# Altium PCB WreckerCar_PCB.PcbDoc
Units mil, origin at the board's own origin, x right, y up, seen from the top; angles counter-clockwise.
Board outline 2790.87 x 2195.87 mil, 2 copper layers (Top Layer, Bottom Layer); 47 components, 80 nets, 305 pads, 101 vias.
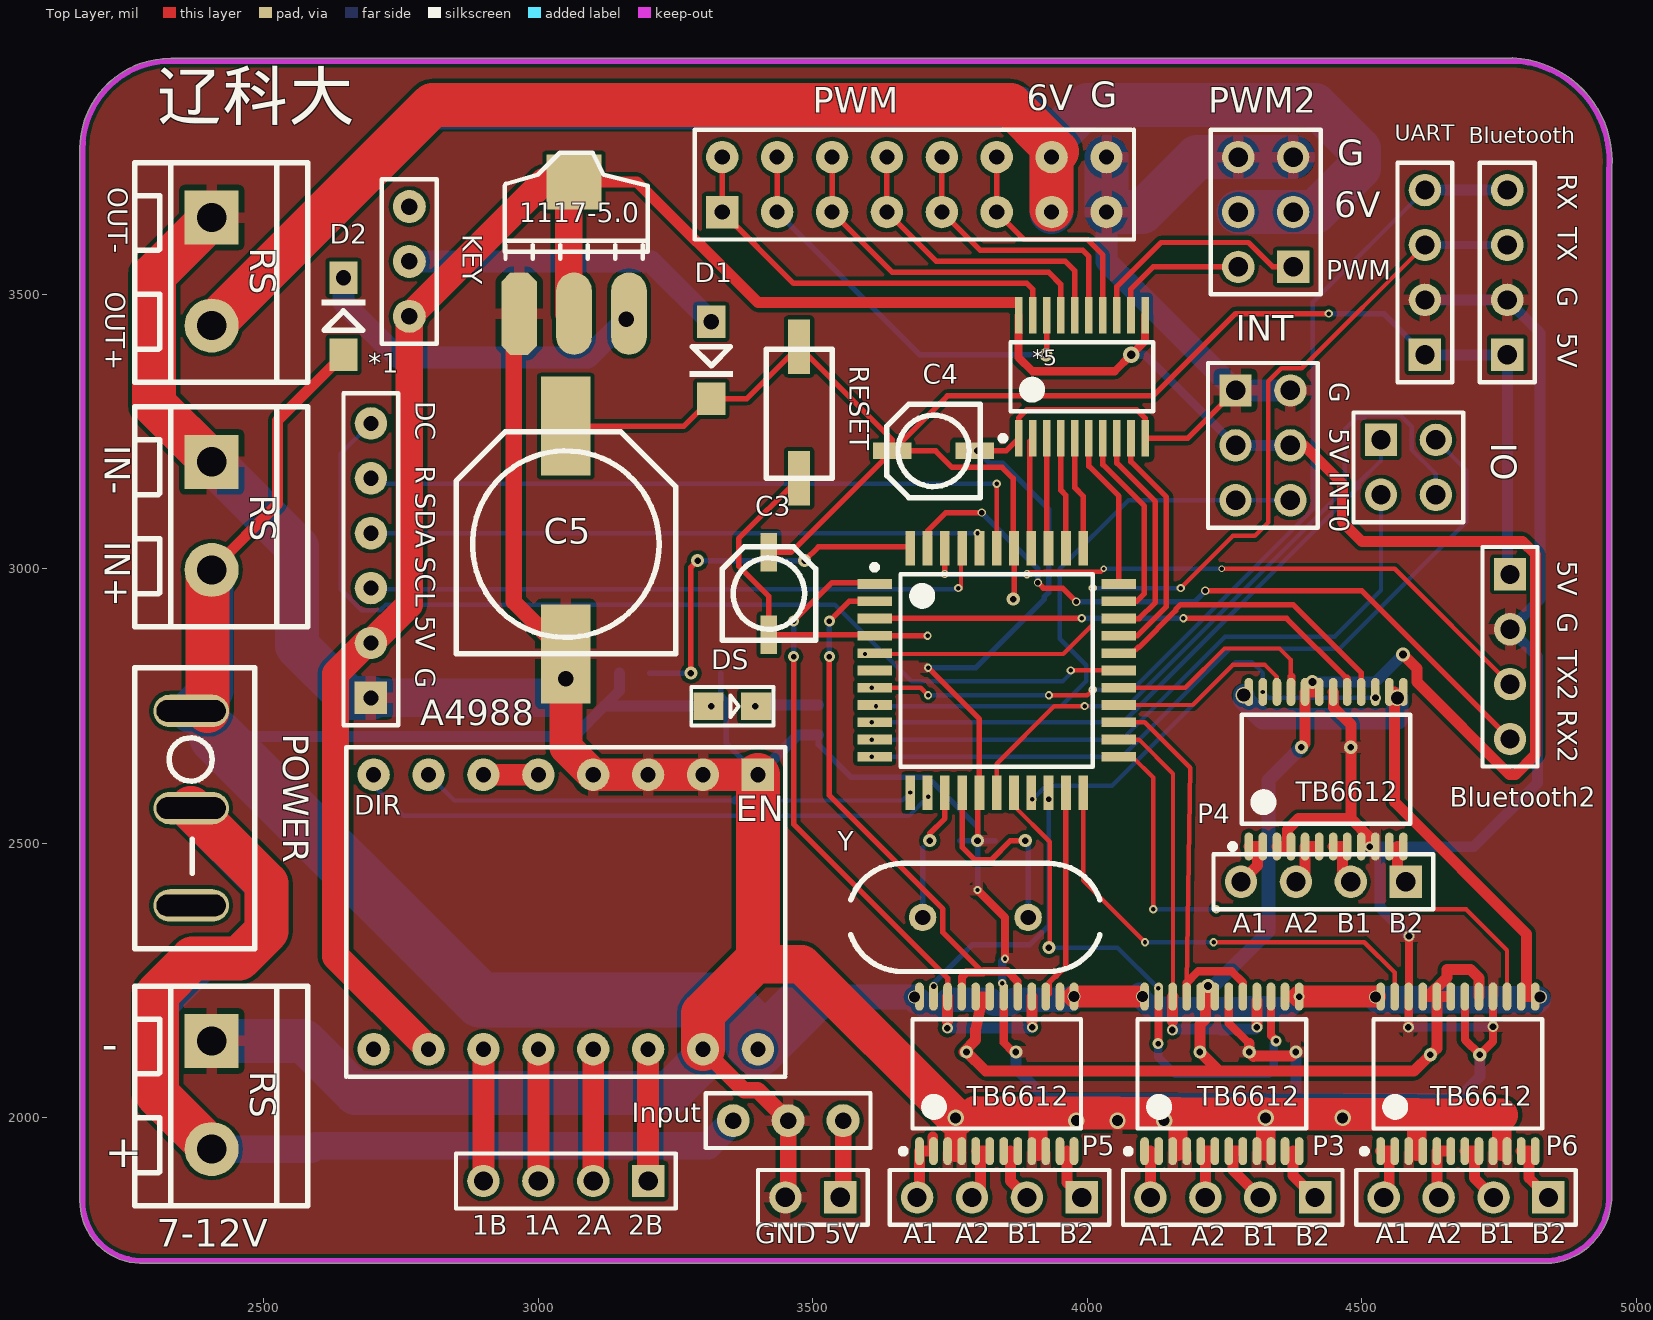
[diagram p0: Top Layer view]
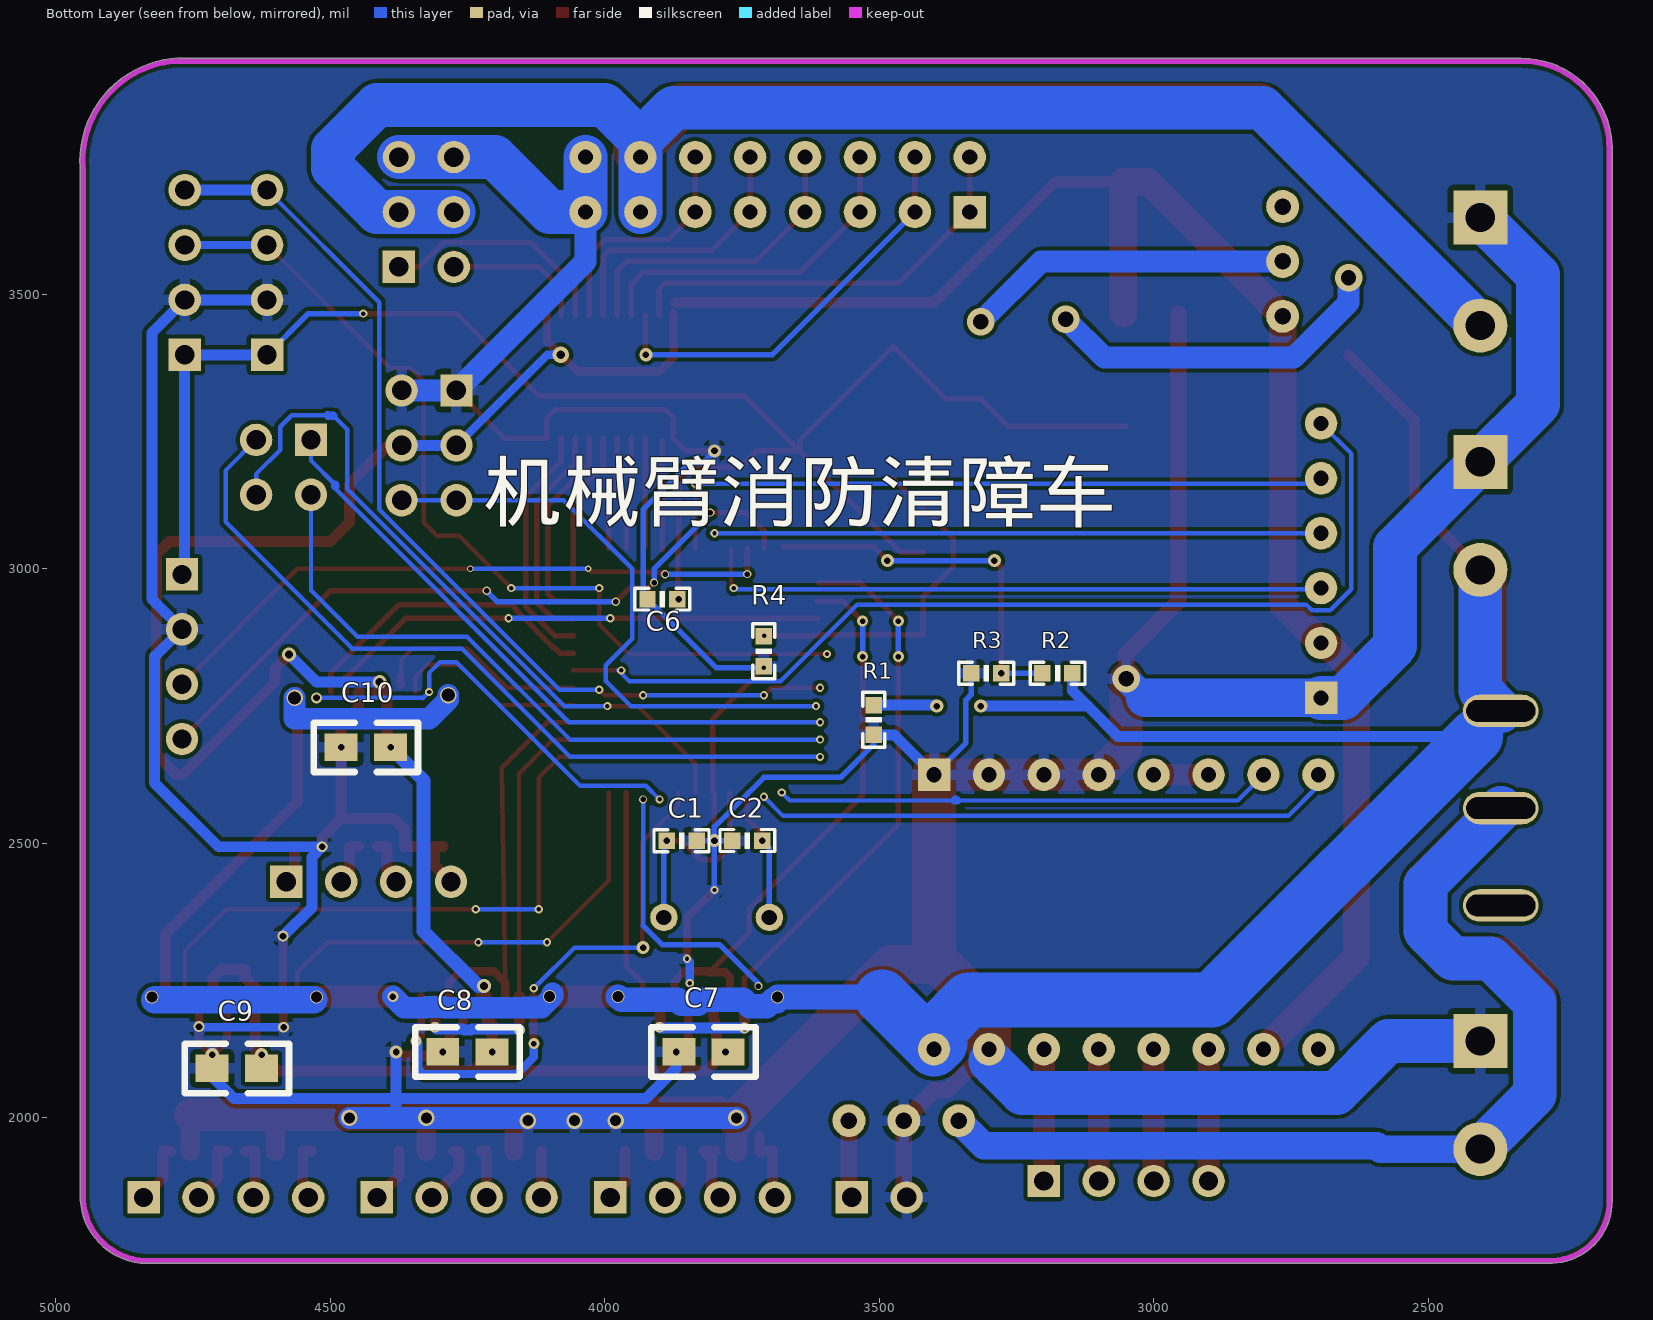
[diagram p1: Bottom Layer view, seen from below]

## Layer stack, top to bottom
Top Solder: solder mask 0.4, Solder Resist, Dk 3.5
Top Layer: signal copper 1.4
Dielectric 1: dielectric 12.6, FR-4, Dk 4.8
Bottom Layer: signal copper 1.4
Bottom Solder: solder mask 0.4, Solder Resist, Dk 3.5

## Board outline
2164.99,1850.06 ccw(c2277.5,1847.5) 2274.88,1734.99 ccw(c2275,1740) 2275,1734.98 4824.84,1734.98 ccw(c4832.5,1857.5) 4955,1849.68 ccw(c4950,1850) 4955.02,1850 ccw(c4950,1850) 4955.02,1850.03 4955.02,3724.76 ccw(c4767.5,3742.5) 4955.85,3742.5 ccw(c4767.5,3742.5) 4775.23,3930.69 ccw(c4775.03,3925.68) 4772.5,3930.01 2330,3930.01 ccw(c2330,3765) 2164.99,3765 2164.99,1850.06 cw(c2277.5,1847.5)

## Design rules (kind name [scope] priority, off if disabled: settings)
Clearance [All] p1: gap=7 ignorepadtopadclearanceinfootprint=FALSE
DiffPairsRouting [All] p1: maxlimit=10 minlimit=2 mostfreqgap=10 toplayer_minwidth=15 toplayer_maxwidth=15 toplayer_prefwidth=15 bottomlayer_minwidth=15 bottomlayer_maxwidth=15 bottomlayer_prefwidth=15 maxuncoupledlength=500
HoleSize [All] p1: absolutevalues=TRUE maxlimit=200 minlimit=1 maxpercent=80.000 minpercent=20.000
HoleToHoleClearance [All] p1: gap=2 allowstackedmicrovias=TRUE
MinimumSolderMaskSliver [All] p1: minsoldermaskwidth=1
NetAntennae [All] p1: netantennaetolerance=1
PlaneClearance [All] p1: clearance=10
PolygonConnect [All] p1: connectstyle=Relief reliefconductorwidth=20 reliefentries=4 polygonreliefangle="90 Angle" airgapwidth=10
RoutingVias [All] p1: holewidth=28 width=30 viastyle="Through Hole" minholewidth=6 minwidth=10 maxholewidth=40 maxwidth=50
SilkToSilkClearance [All] p1: silktosilkclearance=1
SilkToSolderMaskClearance [IsPad] p1: minsilkscreentomaskgap=1 clearancetoexposedcopper=TRUE
SolderMaskExpansion [All] p1: expansion=2
Width [All] p1: maxlimit=120 minlimit=7 preferedwidth=10
22 further rules are at their usual default settings.

## Classes and differential pairs
component class WreckerCar_Sch: *1 *5 BOOT? C1 C2 C3 C4 C5 C6 C7 C8 C9 C10 D1 D2 P3 P4 P5 P6 R1 R2 R3 R4 RS RS?

## Components (designator, comment, footprint, x,y, rotation, side; value= is the part's Value field where it differs from the comment)
1117-5.0 "AMS1117-5.0" AMS1117 2965,3465 r0 top (schematic designator 1)
*1 "oled" header1*6 2590,3140 r90 top
*5 "74HC573PW" TSSOP-20 3960,3415 r90 top
*6 "STC12C5A60S2" LQFP-44 3800,2810 r0 top
*9 "LM7805" header1*3 3490,2000 r0 top
A4988 "A4988" A4988 3055,2595 r180 top (schematic designator *8)
Bluetooth "Bluetooth" HDR1X4 4765,3390 r90 top (schematic designator *4)
Bluetooth2 "UART2" HDR1X4 4770,2990 r270 top (schematic designator *3)
C1 "22pF" 0603P 3860,2505 r180 bottom
C2 "22pF" 0603P 3740,2505 r0 bottom
C3 "10uF" Cap10uF 3420,2955 r270 top
C4 "10uF" Cap10uF 3720,3215 r0 top
C5 "1000uF" Cap1000uF 3050,3045 r270 top
C6 "103" 0603P 3895,2945 r180 bottom
C7 "100nF" 0805 3865,2120 r180 bottom
C8 "100nF" 0805 4295,2120 r180 bottom
C9 "100nF" 0805 4715,2090 r180 bottom
C10 "100nF" 0805 4480,2675 r180 bottom
D1 "1N4148" DIODE_SOP 3315,3450 r270 top
D2 "1N4148" DIODE_SOP 2645,3390 r90 top
DS "LED1" SMDLED 3310,2750 r0 top (schematic designator DS?)
INT "INT" HDR2X3 4270,3325 r270 top (schematic designator BOOT?)
IO "IO" HDR2X2 4535,3235 r270 top (schematic designator P7)
KEY "POWER" header1*3 2760,3595 r90 top (schematic designator *11)
P1 "A4988Out" HDR1X4 3200,1885 r180 top
P2 "VREF_SEL" HDR1X2 3550,1855 r180 top
P3 "M1" HDR1X4 4415,1855 r180 top
P4 "M2" HDR1X4 4580,2430 r180 top
P5 "M5M6" HDR1X4 3990,1855 r180 top
P6 "M3M4" HDR1X4 4840,1855 r180 top
POWER "SW_SPDT" 钮子开关 2430,2410 r270 top (schematic designator *10)
PWM "PWM" HEADER2*8 3580,3750 r0 top (schematic designator *2)
PWM2 "Header 3X2" HDR2X3 4375,3550 r90 top (schematic designator BOOT?)
R1 "1K" 0603P 3510,2725 r270 bottom
R2 "10K" 0603P 3175,2810 r0 bottom
R3 "3K" 0603P 3305,2810 r0 bottom
R4 "10K" 0603P 3710,2850 r270 bottom
RESET "KEY_M" KEY 3450,3245 r270 top (schematic designator RESET?)
RS "RS485" HEAD2L-0.8 2405,3640 r270 top (schematic designator RS?)
RS "RS485" HEAD2L-0.8 2405,3195 r270 top (schematic designator RS?)
RS "RS485" HEAD2L-0.8 2405,2140 r270 top (schematic designator RS?)
TB6612 "TB6612" TSOP65P760X120-24N 4145,2165 r90 top (schematic designator *12)
TB6612 "TB6612" TSOP65P760X120-24N 4335,2720 r90 top (schematic designator *13)
TB6612 "TB6612" TSOP65P760X120-24N 3735,2165 r90 top (schematic designator *14)
TB6612 "TB6612" TSOP65P760X120-24N 4575,2165 r90 top (schematic designator *15)
UART "UART" HDR1X4 4615,3390 r90 top (schematic designator *7)
Y "12M" XTAL_US 3700,2365 r0 top (schematic designator Y1)

## Footprints (in the part's own frame and the unit in brackets; to place one, negate y for a bottom-side part, rotate by r counter-clockwise, add the part's x,y. Pads: shape width x height; smd on the part's side, far side on the other; paste and mask are expansions set on the pad)
0603P [mil]
  rect 30x30 smd: 1(-27,0) 2(27.5,-0.06)
  silkscreen extent -50,-20 50,20
0805 [mil]
  rect 60x50 smd: 1(0,0) 2(90,-0.06)
  silkscreen extent -50,-45 140,45
A4988 [mm]
  rect 1.5x1.5 hole 0.7: 1(-8.763,-0.762)
  round 1.5 hole 0.7: 2(-8.763,11.938) 3(-6.223,-0.762) 4(-6.223,11.938) 5(-3.683,-0.762) 6(-3.683,11.938) 7(-1.143,-0.762) 8(-1.143,11.938) 9(1.397,-0.762) 10(1.397,11.938) 11(3.937,-0.762) 12(3.937,11.938) 13(6.477,-0.762) 14(6.477,11.938) 15(9.017,-0.762) 16(9.017,11.938)
  silkscreen extent -10.03,-2.03 10.29,13.21
AMS1117 [mil]
  oct 65x150 smd: 1(0.03,-0.06)
  oval 65x150 smd: 2(100.03,-0.06) 3(200.03,-0.06)
  rect 100x100 smd: 4(100.03,239.94)
  silkscreen extent -26,100 234,293
Cap10uF [mil]
  rect 70x30 smd: 1(-75,0) 2(75,0)
  silkscreen extent -85,-85 85,85
Cap1000uF [mil]
  rect 180x90 smd: 1(-215,0) 2(200,0)
  silkscreen extent -205,-200 200,200
DIODE_SOP [mm]
  rect 1.5x1.3 smd: 1(0,0) 2(3.556,0)
  silkscreen extent 1.14,-1.02 2.56,1.02
HDR1X2 [mm]
  rect 1.5x1.5 hole 0.9: 1(0,0)
  round 1.5 hole 0.9: 2(2.54,0)
  silkscreen extent -1.27,-1.27 3.81,1.27
HDR1X4 [mm]
  rect 1.5x1.5 hole 0.889: 1(0,0)
  round 1.5 hole 0.889: 2(2.54,0) 3(5.08,0) 4(7.62,0)
  silkscreen extent -1.27,-1.27 8.89,1.27
HDR2X2 [mm]
  rect 1.5x1.5 hole 0.9: 1(0,0)
  round 1.5 hole 0.9: 2(0,2.54) 3(2.54,0) 4(2.54,2.54)
  silkscreen extent -1.27,-1.27 3.81,3.81
HDR2X3 [mm]
  rect 1.5x1.5 hole 0.9: 1(0,0)
  round 1.5 hole 0.9: 2(0,2.54) 3(2.54,0) 4(2.54,2.54) 5(5.08,0) 6(5.08,2.54)
  silkscreen extent -1.27,-1.27 6.35,3.81
HEAD2L-0.8 [mm]
  rect 2.5x2.5 hole 1.35: 1(0,0)
  round 2.5 hole 1.35: 2(5,0)
  silkscreen extent -2.54,-3.56 7.62,4.45
header1*3 [mil]
  round 60 hole 30: 1(-135,-5) 2(-35,-5) 3(65,-5)
  silkscreen extent -185,-55 115,45
header1*6 [mm]
  rect 1.5x1.5 hole 0.7: 1(-9.525,-2.667)
  round 1.5 hole 0.7: 2(-6.985,-2.667) 3(-4.445,-2.667) 4(-1.905,-2.667) 5(0.635,-2.667) 6(3.175,-2.667)
  silkscreen extent -10.79,-3.94 4.57,-1.4
HEADER2*8 [mm]
  rect 1.5x1.5 hole 0.7: 1(-6.223,-2.54)
  round 1.5 hole 0.7: 2(-6.223,0) 3(-3.683,-2.54) 4(-3.683,0) 5(-1.143,-2.54) 6(-1.143,0) 7(1.397,-2.54) 8(1.397,0) 9(3.937,-2.54) 10(3.937,0) 11(6.477,-2.54) 12(6.477,0) 13(9.017,-2.54) 14(9.017,0) 15(11.557,-2.54) 16(11.557,0)
  silkscreen extent -7.49,-3.81 12.83,1.27
KEY [mil]
  rect 99.37x40.31 smd: 1(-160,25) 2(80,25)
  silkscreen extent -155,-35 80,85
LQFP-44 [mm]
  rect 1.6x0.45 smd: 1(-4.761,4.127) 2(-4.761,3.327) 3(-4.761,2.527) 4(-4.761,1.727) 5(-4.761,0.927) 6(-4.761,0.127) 7(-4.761,-0.673) 8(-4.761,-1.473) 9(-4.761,-2.273) 10(-4.761,-3.073) 11(-4.761,-3.873) 23(6.539,-3.873) 24(6.539,-3.073) 25(6.539,-2.273) 26(6.539,-1.473) 27(6.539,-0.673) 28(6.539,0.127) 29(6.539,0.927) 30(6.539,1.727) 31(6.539,2.527) 32(6.539,3.327) 33(6.539,4.127)
  rect 0.45x1.6 smd: 12(-3.111,-5.523) 13(-2.311,-5.523) 14(-1.511,-5.523) 15(-0.711,-5.523) 16(0.089,-5.523) 17(0.889,-5.523) 18(1.689,-5.523) 19(2.489,-5.523) 20(3.289,-5.523) 21(4.089,-5.523) 22(4.889,-5.523) 34(4.889,5.777) 35(4.089,5.777) 36(3.289,5.777) 37(2.489,5.777) 38(1.689,5.777) 39(0.889,5.777) 40(0.089,5.777) 41(-0.711,5.777) 42(-1.511,5.777) 43(-2.311,5.777) 44(-3.111,5.777)
  silkscreen extent -4.89,-4.32 5.34,5.03, body extent -4.11,-4.87 5.89,5.13, height 1.6
SMDLED [mm]
  rect 1.4x1.27 smd: 1(0.001,-0.002) 2(2.211,-0.002)
  silkscreen extent -0.8,-0.89 3.01,0.89
TSOP65P760X120-24N [mm]
  oval 1.3x0.4 smd: 1(-5.734,1.035) 2(-5.734,0.385) 3(-5.734,-0.265) 4(-5.734,-0.915) 5(-5.734,-1.565) 6(-5.734,-2.215) 7(-5.734,-2.865) 8(-5.734,-3.515) 9(-5.734,-4.165) 10(-5.734,-4.815) 11(-5.734,-5.465) 12(-5.734,-6.115) 13(1.416,-6.115) 14(1.416,-5.465) 15(1.416,-4.815) 16(1.416,-4.165) 17(1.416,-3.515) 18(1.416,-2.865) 19(1.416,-2.215) 20(1.416,-1.565) 21(1.416,-0.915) 22(1.416,-0.265) 23(1.416,0.385) 24(1.416,1.035)
  silkscreen extent -5.86,-6.44 0.37,1.91, body extent -4.96,-6.44 0.64,1.36, height 1.2
TSSOP-20 [mm]
  rect 1.7x0.35 smd: 1(-4.501,2.163) 2(-4.501,1.513) 3(-4.501,0.863) 4(-4.501,0.213) 5(-4.501,-0.437) 6(-4.501,-1.087) 7(-4.501,-1.737) 8(-4.501,-2.387) 9(-4.501,-3.037) 10(-4.501,-3.687) 11(1.199,-3.687) 12(1.199,-3.037) 13(1.199,-2.387) 14(1.199,-1.737) 15(1.199,-1.087) 16(1.199,-0.437) 17(1.199,0.213) 18(1.199,0.863) 19(1.199,1.513) 20(1.199,2.163)
  silkscreen extent -4.63,-4.06 -0.05,3.01, body extent -3.9,-4.06 0.6,2.54, height 1.1
XTAL_US [mil]
  round 50 hole 28: 1(0,0) 2(192.13,0)
  silkscreen extent -131,-98 323,98
钮子开关 [mm]
  oval 1.5x3.5 hole 1 slot 3.2 at 90 deg: 1(-8.414,-1.587) 2(-3.914,-1.587) 3(0.586,-1.587)
  silkscreen extent -10.41,-4.19 2.59,1.35

## Part data
1117-5.0: library part AMS1117
*1: library part header1*6
*9 KEY: library part header3*1
A4988 PWM: library part HEADER2*8
Bluetooth Bluetooth2 UART: library part Header4booth
C1 C2 C6 C7 C8 C9 C10: library part C
C3 C4 C5: library part CAP
D1 D2: library part D
DS: library part LED2, "Typical RED, GREEN, YELLOW, AMBER GaAs LED", PackageDocument=Feb-2002, LatestRevisionDate=17-Jul-2002, LatestRevisionNote="Re-released for DXP Platform.", PackageReference=3.2X1.6X1.1, Published=8-Jun-2000, Publisher="Altium Limited"
INT: library part "Header 3X2", "Header, 3-Pin, Dual row", LatestRevisionDate=17-Jul-2002, LatestRevisionNote="Re-released for DXP Platform.", Publisher="Altium Limited"
IO: library part "Header 2X2", "Header, 2-Pin, Dual row", LatestRevisionDate=17-Jul-2002, LatestRevisionNote="Re-released for DXP Platform.", Publisher="Altium Limited"
P1 P3 P4 P5 P6: library part "Header 4", "Header, 4-Pin", LatestRevisionDate=17-Jul-2002, LatestRevisionNote="Re-released for DXP Platform.", Publisher="Altium Limited"
P2: library part "Header 2", "Header, 2-Pin", LatestRevisionDate=17-Jul-2002, LatestRevisionNote="Re-released for DXP Platform.", Publisher="Altium Limited"
PWM2: "Header, 3-Pin, Dual row", LatestRevisionDate=17-Jul-2002, LatestRevisionNote="Re-released for DXP Platform.", Publisher="Altium Limited"
R1 R2 R3 R4: library part R
RS RS RS: library part HEAD2
Y: library part XTAL, "Crystal Oscillator", LatestRevisionDate=17-Jul-2002, LatestRevisionNote="Re-released for DXP Platform.", Published=8-Jun-2000, Publisher="Altium Limited"

## Via types
v1: diameter 15, hole 8, Top Layer to Bottom Layer, 33 vias
v2: diameter 24, hole 12, Top Layer to Bottom Layer, 21 vias
v3: diameter 20, hole 12, Top Layer to Bottom Layer, 10 vias
v4: diameter 15, hole 10, Top Layer to Bottom Layer, 8 vias
v5: diameter 20, hole 10, Top Layer to Bottom Layer, 6 vias
v6: diameter 30, hole 20, Top Layer to Bottom Layer, 6 vias
v7: diameter 24, hole 20, Top Layer to Bottom Layer, 5 vias
v8: diameter 50, hole 28, Top Layer to Bottom Layer, 4 vias
v9: diameter 25, hole 15, Top Layer to Bottom Layer, 3 vias
v10: diameter 30, hole 24, Top Layer to Bottom Layer, 2 vias
v11: diameter 30, hole 15, Top Layer to Bottom Layer, 1 vias
v12: diameter 12, hole 6, Top Layer to Bottom Layer, 1 vias
v13: diameter 12, hole 8, Top Layer to Bottom Layer, 1 vias

## Nets (pads, with @x,y where several pads share a name; then routed paths per layer and width w, separated by ;. In a path a pad name is that pad's centre, name@x,y a point inside that pad or via, vN(x,y) a via of type N, cw(c..) or ccw(c..) an arc to the next point about the centre after c; other vN are vias at no path point)
5V: 1117-5.0.2 1117-5.0.4 *1.2 *5.11 *5.20 A4988.14 C7.2 C8.2 C9.2 C10.2 INT.3 INT.4 KEY.1 TB6612.17@4713.39,2220.75 TB6612.19 TB6612.20 TB6612.21@4611.02,2220.75 | length 7346.3
  Top Layer w10: *5.20 *5.20@3874.84,3469.69
  Top Layer w15: *5.20 3874.84,3385.16 3900,3360 4050,3360 v11(4080,3390) 4105.16,3415.16 *5.11
  Top Layer w20: 1117-5.0.4@3055.03,3704.94 3180.06,3704.94 3400,3485 *5.20@3870,3485 ; TB6612.19@3818.39,2220 3805,2220 3805,2200 3796.61,2161.35 3796.61,2141.55 3775,2119.94 3780.06,2119.94 3815,2085 4240,2085 ; TB6612.19@4225,2220.75 4215,2220.75 4215,2180 4205,2170 v2(4205,2120) 4240,2085 ; INT.4 4395,3225 4465,3155 4465,3085 4500,3050 4793.1,3050 4816.53,3026.57 4816.53,2661.53 4780,2625 4769.2,2625 4600.62,2793.58 4600.62,2818.34 v9(4575,2843.96) v9@4575,2845 ; v2(4390,2675) 4396.61,2681.61 4396.61,2775.75 TB6612.19@4415,2775.75 ; TB6612.19@4655,2220.75 TB6612.20@4636.61,2220.75 ; TB6612.17@4713.39,2220.75 4713.39,2255 4698.39,2270 4655,2270 4655,2255.75 4620,2220.75 TB6612.20@4636.61,2220.75 ; 4240,2085 4595.06,2085 v2(4625,2114.94) 4636.61,2126.55 TB6612.20@4636.61,2220.75
  Top Layer w50: A4988.14 2630.47,2294.53 2630.47,2809.03 2686.45,2865 *1.2 2765,2935 KEY.1 3009.94,3704.94 3055.03,3704.94 1117-5.0.2@3055.03,3464.94
  Bottom Layer w15: v11(4080,3390) 4105,3390 INT.3
  Bottom Layer w20: INT.3 INT.4 ; v9(4410,2793.96) 4525,2793.96 v9(4575,2843.96)
  Bottom Layer w25: v9(4220,2240) 4230,2240 4330,2340 4330,2615 v2(4390,2675)
  other v2: 3780,2119.94
6V: PWM2.3 PWM2.4 PWM.13 PWM.14 RS.2@2405,3443.15 | length 4614.1
  Top Layer w80: RS.2@2405,3443.15 2806.85,3845 3860,3845 3935,3770 PWM.14 ; PWM.13@3935,3655 PWM.14 ; PWM.14@3945,3760 PWM.14
  Bottom Layer w80: RS.2@2405,3443.15 2801.85,3840 3875,3840 3935,3780 ; PWM.13 PWM.14 3935,3780 ; PWM2.4 PWM2.3 4415,3650 4495,3730 4495,3765 4415,3845 4000,3845 3935,3780
12V: A4988.2 D2.1 DS.1 POWER.1 R2.1 RS.2@2405,2998.15 TB6612.13 TB6612.14 TB6612.24 | length 5869.8
  Top Layer w20: RS.2@2405,2998.15 2525,3118.15 2525,3270 D2.1 ; TB6612.14@3952.28,2220.75 v7(3975.75,2220.75) ; 4370,2220.75 v3(4385.75,2220.75) ; v10@4560,2775.75 4560,2575 4800,2335 4800,2220.75 4815.75,2220.75 v7@4824.25,2220.75
  Top Layer w40: v7(3975.75,2220.75) v7@4090,2220.75 ; v3(4385.75,2220.75) v7@4524.25,2220.75
  Top Layer w80: POWER.1@2397.52,2741.26 RS.2@2397.52,2998.15
  Bottom Layer w20: POWER.1 2413.78,2695 3065,2695 3120,2750 ; R2.1 3148,2778 3120,2750 ; v2(3315,2750) 3120,2750 ; v7(4525,2220) v7@4530,2215 ; v7@4820,2215 v7(4825,2220)
  Bottom Layer w40: v7@3685,2210 v7@3690,2215 ; v7@4094.65,2226.51 4094.65,2221.56 4114.86,2201.35 4143.44,2201.35 4144.29,2200.5 4292.15,2200.5 4293.65,2202 4324.3,2202 4325.8,2200.5 4365.5,2200.5 v3(4385.75,2220.75) ; v10(4285,2770) 4285,2761.8 4319.8,2727 4565,2727 v10(4565,2765)
  Bottom Layer w45: 3495,2220 v7(3685,2220) ; v7@3690,2215 3692.67,2215 3704.67,2203 3735.33,2203 3747.33,2215 3822.67,2215 3829.67,2208 3860.33,2208 3867.33,2215 3970,2215 v7(3975.75,2220.75)
  Bottom Layer w50: v7@4530,2215 v7@4820,2215
  Bottom Layer w80: POWER.1 2405,2778.74 RS.2@2405,2998.15
  Bottom Layer w100: 2413.78,2695 2894.25,2214.53 3337.08,2214.53 3389.53,2162.08 A4988.2@3389.53,2135.47 ; A4988.2 3495,2220
  other v7: 4100.75,2220.75
A1: A4988.10 P1.3 | length 240
  Top Layer w40: P1.3 A4988.10
A2: A4988.8 P1.2 | length 240
  Top Layer w40: P1.2 A4988.8
ADC: *6.44 R2.2 R3.1 | length 680.8
  Top Layer w10: v2(3277.94,2810.06) 3277.94,3002.94 v2(3290,3015) ; v2(3485,3015) 3510,3040 *6.44@3674.96,3040
  Bottom Layer w10: R2.2 v2(3277.94,2810.06) R3.1 ; v2(3290,3015) v2(3485,3015)
AO1: P3.3 TB6612.5@4206.61,1939.25 TB6612.6@4232.2,1939.25 | length 94.3
  Top Layer w20: P3.3 4215,1939.25 TB6612.6@4225,1939.25
AO2: P3.4 TB6612.1@4104.25,1939.25 TB6612.2@4129.84,1939.25 | length 84.3
  Top Layer w20: P3.4 4115,1939.25
AO3: P4.3 TB6612.5@4396.61,2494.25 TB6612.6@4422.2,2494.25 | length 89.5
  Top Layer w20: P4.3 4396.61,2446.61 4396.61,2494.25 TB6612.6@4415,2494.25
AO4: P4.4 TB6612.1@4294.25,2494.25 TB6612.2@4319.84,2494.25 | length 92.4
  Top Layer w20: P4.4 4310,2460 4310,2494.25 TB6612.1@4294.25,2494.25
AO5: P5.3 TB6612.5@3796.61,1939.25 TB6612.6@3822.2,1939.25 | length 111.4
  Top Layer w20: TB6612.5@3798.02,1939.25 3819.25,1939.25 3805,1925 P5.3@3805,1855
AO6: P5.4 TB6612.1@3694.25,1939.25 TB6612.2@3719.84,1939.25 | length 130.1
  Top Layer w20: P5.4@3694.25,1859.25 3694.25,1939.25 3718.43,1939.25 3718.43,1965.15
AO7: P6.3 TB6612.5@4636.61,1939.25 TB6612.6@4662.2,1939.25 | length 104
  Top Layer w20: P6.3 4636.61,1858.39 4636.61,1939.25 TB6612.6@4655,1939.25
AO8: P6.4 TB6612.1@4534.25,1939.25 TB6612.2@4559.84,1939.25 | length 104.1
  Top Layer w20: TB6612.1@4534.25,1939.25 4550,1939.25 4550,1865 P6.4
B1: A4988.12 P1.4 | length 240
  Top Layer w40: P1.4 A4988.12
B2: A4988.6 P1.1 | length 240
  Top Layer w40: P1.1 A4988.6
BO1: P3.1 TB6612.11@4360.16,1939.25 TB6612.12@4385.75,1939.25 | length 100.8
  Top Layer w20: 4375,1939.25 4375,1895 P3.1
BO2: P3.2 TB6612.7@4257.8,1939.25 TB6612.8@4283.39,1939.25 | length 115
  Top Layer w20: 4275,1939.25 4265,1939.25 4265,1905 P3.2
BO3: P4.1 TB6612.11@4550.16,2494.25 TB6612.12@4575.75,2494.25 | length 70.5
  Top Layer w20: 4565,2494.25 4565,2445 P4.1
BO4: P4.2 TB6612.7@4447.8,2494.25 TB6612.8@4473.39,2494.25 | length 87.7
  Top Layer w20: TB6612.7@4447.8,2494.25 4465,2494.25 4465,2445 P4.2
BO5: P5.1 TB6612.11@3950.16,1939.25 TB6612.12@3975.75,1939.25 | length 95.5
  Top Layer w20: 3962.95,1939.25 3962.95,1882.05 P5.1
BO6: P5.2 TB6612.7@3847.8,1939.25 TB6612.8@3873.39,1939.25 | length 96.7
  Top Layer w20: 3860,1939.25 3860,1885 P5.2
BO7: P6.1 TB6612.11@4790.16,1939.25 TB6612.12@4815.75,1939.25 | length 113.6
  Top Layer w20: TB6612.11@4790.16,1939.25 4805,1939.25 4805,1890 P6.1
BO8: P6.2 TB6612.7@4687.8,1939.25 TB6612.8@4713.39,1939.25 | length 116
  Top Layer w20: TB6612.7@4687.8,1939.25 4705,1939.25 4705,1890 P6.2
DC: *1.6 *6.28 | length 1829
  Top Layer w8: v1@3975,2815 *6.28
  Bottom Layer w8: *1.6 2640,3210 2640,2962.69 2678.21,2924.47 2711.79,2924.47 2722.31,2935 3540,2935 3680,2795 3955,2795 v1@3975,2815
  other v1: 3970,2815
DIR: *6.13 A4988.15 | length 1067.3
  Bottom Layer w8: A4988.15@2700,2605 2755,2550 3675,2550 v1(3710,2585)
  Bottom Layer w15: A4988.15@2700,2605 A4988.15
GND: 1117-5.0.1 *1.1 *5.1 *5.10 *6.16 *9.2 A4988.1 A4988.3 A4988.4 A4988.5 A4988.7 Bluetooth2.2 Bluetooth.2 C1.2 C2.2 C4.2 C5.2 C6.1 C7.1 C8.1 C9.1 C10.1 INT.1 INT.2 P2.2 PWM2.5 PWM2.6 PWM.15 PWM.16 R1.2 R3.2 R4.2 RS.1 TB6612.3 TB6612.4 TB6612.9 TB6612.10 TB6612.16@4738.98,2220.75 TB6612.18 TB6612.22@4585.43,2220.75 UART.2 | length 15320.4
  Top Layer w10: v1(3710,2820) 3803.5,2726.5 *6.16 ; C4.2@3790,3220 C4.2 ; v2(3800,2505) *6.16@3800,2589.05 ; v2(3800,3215) 3852.05,3215 *5.1 3874.84,3274.84 3890,3290 4090,3290 4105.16,3274.84 *5.10 4182.8,3237.8 INT.1
  Top Layer w15: v1(3800,2415) 3850,2365 v1(3850,2290) ; TB6612.18@3847.8,2220.75 3847.8,2137.2 v2@3865,2120 ; TB6612.18@4257.8,2220.75 4257.8,2172.2 4295,2135 ; v3@4585.43,2165.43 TB6612.22@4585.43,2220.75 ; TB6612.22@4585.97,2220.75 v3(4585.97,2330.97) ; TB6612.18@4687.8,2220.75 4687.8,2142.2 v2(4715,2115) 4738.98,2138.98 v3(4738.98,2166.02) TB6612.16@4738.98,2220.75
  Top Layer w20: 4165,1939.25 4170,1939.25 ; 4295,2135 v2(4295,2120) 4303,2112 4304,2113 4373,2113 v2(4380,2120) ; TB6612.3@4345.43,2494.25 4365,2494.25 4365,2525 4385,2545 4480,2545 ; TB6612.18@4447.8,2775.75 4448.51,2775.03 4448.51,2747.73 4480,2716.24 v2(4480,2675) 4480,2545 ; v3@4515,2494.25 4515,2510 4480,2545
  Top Layer w30: 1117-5.0.1@2955.03,3464.94 2955.03,2939.97 C5.2 v8(3050,2800) ; A4988.4 3375,2050 3400,2050 *9.2 P2.2@3455,1860
  Top Layer w35: 3910,1939.25 3910,2009.22 ; 4165,1939.25 4165,2007.92 ; 4325,1939.25 v6@4325,2007.15 ; 4600,1939.25 4600,2000.83 ; 4755,1939.25 4755,2005
  Top Layer w40: 3760,1939.25 v6(3760,2000)
  Top Layer w60: v8(3050,2800) 3050,2675 A4988.7 A4988.1 ; 3795.07,2009.82 3910,2009.25 3980.07,2008.89 4055.07,2008.52 4140.07,2008.09 4165,2007.96 v6@4325,2007.16 ; v6@4325.04,2007.16 4465.03,2006.46 4600.02,2005.78 4755,2005
  Top Layer w70: 3400,2280 3480,2280 v6(3760,2000)
  Top Layer w80: RS.1@2405,3195 2300,3300 2300,3535 RS.1@2405,3640 ; A4988.4 3300,2190 3400,2290 A4988.1
  Bottom Layer w10: R3.2 3332.5,2770.68 3342,2761.18 3342,2683 A4988.1 ; R1.2 3510.06,2679.94 3570,2620 3710,2620 3800,2530 v2@3800,2505.06 ; v1(3710,2820) 3797,2820 C6.1 3922,2949.42 3929.5,2956.92 3929.5,3108.68 3846.18,3192 3823,3192 v2(3800,3215) ; C2.2 v2@3800,2505.06 ; v1(3800,2415) v2(3800,2505) v2@3800,2505.06 ; C1.2@3832.37,2505.06 v2@3800,2505.06
  Bottom Layer w15: v1(3845,2245) 3845,2285 v1(3850,2290) ; v3(4585,2165) v3@4737.95,2165
  Bottom Layer w20: A4988.1 3472.5,2697.5 R1.2 ; v2(3870,2120) 3870,2090 3925,2035 4380,2035 ; 4380,2000 4380,2035 ; v2(4380,2120) 4380,2035 ; v3(4585.97,2330.97) 4533.47,2383.47 4533.47,2474.91 v3(4514.57,2493.82) 4703.82,2493.82 4820,2610 4820,2840 Bluetooth2.2 4825,2945 4825,3430 Bluetooth.2 UART.2 ; v2(4715,2115) 4715,2075 4675,2035 4380,2035
  Bottom Layer w40: v6(3760,2000) v6(4325,2000) 4380,2000 v6(4465,2000) ; PWM.15 4035,3560 INT.1 INT.2
  Bottom Layer w50: 3015,2765 v8(3050,2800)
  Bottom Layer w70: *1.1 3015,2765
  Bottom Layer w80: RS.1@2405,2140 2572.53,2140 2667.06,2045.47 3239.53,2045.47 A4988.4@3297.03,2102.97 ; RS.1@2405,3640 2300,3535 2300,3300 2405,3195 2560,3040 2560,2860 2655,2765 *1.1 ; 3289.53,2094.05 3289.53,2095.47 ; PWM.16 PWM.15 4100,3650 4200,3750 PWM2.6 PWM2.5
  other v6: 3980,1995 4055,1995 4140,1995
INT0: *6.8 INT.5 INT.6 | length 1098
  Bottom Layer w8: v1(3615,2750) 3952.43,2750 3998,2795.57 3998,2824.53 3950,2872.53 3950,3000 4075,3125 INT.5 INT.6
Net1_3: 1117-5.0.3 D2.2 | length 630.4
  Bottom Layer w40: v8(2645,3530) 2645,3485 2745,3385 3090,3385 v8(3160,3455)
Net*6_14: *6.14 C2.1 Y.1 | length 226
  Top Layer w10: v2(3713,2505) 3713,2518 3740.51,2545.51 *6.14
  Bottom Layer w10: Y.1 C2.1@3700,2492
Net*6_15: *6.15 C1.1 Y.2 | length 373.5
  Top Layer w10: *6.15 3772.01,2492.99 3795,2470 3825,2470 3860,2505 v2(3887,2505)
  Bottom Layer w10: Y.2 C1.1@3892.13,2499.87
Net*8_9: A4988.9 A4988.11 | length 100
  Top Layer w40: A4988.11 A4988.9
Net*9_1: *9.1 POWER.2 RS.2@2405,1943.15 | length 2664.8
  Top Layer w80: POWER.2 2505,2426.61 2505,2340 2455,2290 2370,2290 2305.79,2225.79 2305.79,2042.36 RS.2@2405,1943.15
  Bottom Layer w50: RS.2@2405,1943.15 2586.85,1943.15 2593.23,1949.53 3309.53,1949.53 *9.1
  Bottom Layer w80: POWER.2 2367.52,2562.48 2505,2425 2505,2340 2455,2290 2385.86,2290 2305.79,2209.92 2305.79,2042.36 RS.2@2405,1943.15
Net*11_2: D1.1 KEY.2 | length 595.6
  Bottom Layer w40: KEY.2 3205,3560 v8(3315,3450)
NetDS?_2: DS.2 R1.1 | length 113
  Bottom Layer w20: v2@3397,2752 R1.1
  other v2: 3395,2750
O0: *5.19 PWM.1 PWM.2 | length 771
  Top Layer w10: PWM.2 PWM.1 3465,3520 3890,3520 3900.43,3509.57 *5.19
O1: *5.18 PWM.3 PWM.4 | length 768.9
  Top Layer w10: PWM.3 PWM.4 ; v2@3926.02,3391.02 *5.18
  Bottom Layer w10: PWM.3 3695,3390 v2(3925,3390)
O2: *5.17 PWM.5 PWM.6 | length 627.3
  Top Layer w10: PWM.6 PWM.5 3645,3540 3930,3540 3951.61,3518.39 *5.17
O3: *5.16 PWM.7 PWM.8 | length 567.2
  Top Layer w10: PWM.8 PWM.7 3725,3560 3960,3560 3977.2,3542.8 *5.16
O4: *5.15 PWM.9 PWM.10 | length 508.1
  Top Layer w10: PWM.10 PWM.9 3805,3580 3991.72,3580 4002.8,3568.92 *5.15
O5: *5.14 PWM.11 PWM.12 | length 435.3
  Top Layer w10: PWM.12 PWM.11 3885,3600 4000,3600 4028.39,3571.61 *5.14
O6: *5.13 PWM2.1 | length 424.6
  Top Layer w10: *5.13 4053.98,3513.98 4134.53,3594.53 4293.44,3594.53 4337.97,3550 PWM2.1
O7: *5.12 PWM2.2 | length 259.5
  Top Layer w10: *5.12 4079.57,3509.57 4120,3550 PWM2.2
OUT0: *5.2 *6.37 | length 197.9
  Top Layer w10: *6.37@3895.43,3034.88 *5.2@3895.43,3232.8
OUT1: *5.3 *6.36 | length 196.9
  Top Layer w10: *6.36@3926.02,3040.91 *5.3
OUT2: *5.4 *6.35 | length 204.2
  Top Layer w10: *5.4 3951.61,3143.39 3960.98,3134.02 *6.35
OUT3: *5.5 *6.34 | length 206.7
  Top Layer w10: *5.5 3977.2,3147.8 3992.48,3132.52 *6.34
OUT4: *5.6 *6.33 | length 287.9
  Top Layer w10: *5.6 4002.8,3187.2 4057.44,3132.56 *6.33
OUT5: *5.7 *6.32 | length 366.4
  Top Layer w10: *5.7 4028.39,3189.9 4103.94,3114.35 4103.94,2955 4089.92,2940.98 *6.32
OUT6: *5.8 *6.31 | length 406.5
  Top Layer w10: *5.8 4053.98,3192.59 4123.94,3122.63 4123.94,2938.94 4094.49,2909.49 *6.31
OUT7: *5.9 *6.30 | length 441.8
  Top Layer w10: *6.30 4090.77,2877.99 4143.94,2931.16 4143.94,3130.92 4079.57,3195.29 *5.9
Output: *9.3 P2.1 | length 135
  Top Layer w30: P2.1@3555,1860 *9.3
P15: *6.1 TB6612.16@3898.98,2220.75 TB6612.22@3745.43,2220.75 | length 1220.1
  Top Layer w10: v5(3465,2840) 3465,2535 3745.43,2254.57 TB6612.22@3745.43,2220.75 ; v5(3465,2905) 3535,2975 *6.1@3610.04,2975
  Top Layer w20: 3745.43,2175.43 TB6612.22@3745.43,2220.75 ; 3898.98,2176.02 TB6612.16@3898.98,2220.75
  Bottom Layer w10: v5(3465,2840) v5(3465,2905)
  Bottom Layer w20: v3(3745,2163.5) 3898.5,2163.5 v3(3900,2165)
P16: *6.2 TB6612.17@3873.39,2220.75 TB6612.21@3771.02,2220.75 | length 1028.8
  Top Layer w10: v5(3530,2840) 3530,2587.33 3737,2380.33 3737,2338 3810,2265 ; v5(3530,2905) 3565.98,2940.98 *6.2
  Top Layer w15: TB6612.21@3771.74,2221.46 3771.74,2256.74 3780,2265 3810,2265 3812,2267 3854.44,2267 3872.67,2248.77 TB6612.17@3872.67,2221.46
  Bottom Layer w10: v5(3530,2840) v5(3530,2905)
P17: *6.3 TB6612.17@4473.39,2775.75 | length 925.6
  Top Layer w10: *6.3 3613.07,2910 v1(3990,2910) ; v1(4175,2910) 4362.9,2910 TB6612.17@4473.01,2799.89
  Top Layer w15: TB6612.17@4473.01,2799.89 4473.01,2776.12 TB6612.17@4473.39,2775.75
  Bottom Layer w10: v1@3995,2910 v1(4175,2910)
P20: *6.18 TB6612.15@4334.57,2220.75 TB6612.23@4129.84,2220.75 | length 1013.1
  Top Layer w8: *6.18 3866.5,2568.14 3931.63,2503.01 v2@3931.63,2310
  Top Layer w15: v5@4129.84,2135.69 TB6612.23@4129.84,2220.75 ; TB6612.15@4334.57,2220.75 4334.57,2149.58 v5(4344.15,2140)
  Bottom Layer w8: v2(3930,2310) 4055,2310 v1(4129.15,2235.85)
  Bottom Layer w15: v5(4129.15,2135) 4129.15,2110.85 4160,2080 4330.51,2080 4339.5,2088.99 4339.5,2135.35 v5(4344.15,2140)
P21: *6.19 TB6612.15@4524.57,2775.75 TB6612.23@4319.84,2775.75 | length 776.6
  Bottom Layer w8: v1(3900,2580) 3925,2605 4045,2605 4270,2830 4300,2830 4319.84,2810.16 v1(4319.84,2775.75) 4331.72,2763.87 4332.85,2765 v3(4525,2765)
P22: *6.20 TB6612.23@3719.84,2220.75 | length 488.5
  Bottom Layer w8: 3930,2350 v4(3930,2580)
  Bottom Layer w10: v4(3720,2240) 3720,2245 3790,2315 3895,2315 3930,2350
P23: *6.21 TB6612.15@3924.57,2220.75 | length 387.7
  Top Layer w10: TB6612.15@3924.57,2220.75 3930.28,2226.46 3930.28,2246.7 3941.93,2258.34 3943.34,2258.34 3960.98,2275.98 *6.21
P24: *6.22 TB6612.23@4559.84,2220.75 | length 836
  Top Layer w8: *6.22 3992.48,2432.52 v1(4105,2320) ; v1@4235,2320 4504.69,2320 4559.84,2264.84 TB6612.23@4559.84,2220.75
  Bottom Layer w8: v1(4105,2320) v1(4230,2320)
P25: *6.23 TB6612.15@4764.57,2220.75 | length 1078.2
  Top Layer w8: *6.23 4082.48,2657.52 4120,2620 v1(4120,2380) ; v1(4235,2380) 4690,2380 4764.57,2305.43 TB6612.15@4764.57,2220.75
  Bottom Layer w8: v1(4120,2380) v1(4235,2380)
P26: *6.24 TB6612.16@4308.98,2220.75 TB6612.22@4155.43,2220.75 | length 782.6
  Top Layer w8: *6.24 4094.02,2689.02 4156.15,2626.88 TB6612.22@4156.15,2221.46
  Top Layer w20: 4155.43,2175.43 4155.43,2220.75 TB6612.22@4156.15,2221.46 ; v3(4308.98,2165) TB6612.16@4308.98,2213.75
  Bottom Layer w20: v3(4155,2160) 4156.94,2161.94 4242.04,2161.94 4243.98,2160 4255.96,2160 4257.96,2162 4305.98,2162 v3(4308.98,2165)
P27: *6.25 TB6612.17@4283.39,2220.75 TB6612.21@4181.02,2220.75 | length 726.6
  Top Layer w8: *6.25 4104.49,2720.51 4187.42,2637.58 TB6612.21@4181.02,2246.02
  Top Layer w15: TB6612.21@4181.02,2220.75 4181.02,2246.02 4202,2267 4263,2267 4283.39,2246.61 TB6612.17@4283.39,2220.75
P33: *6.9 IO.1 | length 1161.8
  Bottom Layer w8: v1@3612.56,2720.51 4065.25,2720.51 4490.97,3146.23 4490.97,3150.21 ; 4490.97,3153.24 4535,3197.26 IO.1
  Bottom Layer w15: 4490.97,3150.21 4490.97,3153.24
  other v1: 3607.56,2720.51
P34: *6.10 IO.3 | length 1209
  Bottom Layer w8: v1@3612.56,2689.02 4063.25,2689.02 4250.74,2876.5 4450.39,2876.5 4535,2961.11 IO.3
  other v1: 3607.56,2689.02
P35: *6.11 IO.2 | length 1427.3
  Bottom Layer w8: v1@3612.56,2657.52 4062.87,2657.52 4259.85,2854.5 4459.5,2854.5 4690,3085 4690,3180 IO.2
  other v1: 3607.56,2657.52
P40: *6.17 IO.4 | length 1286
  Top Layer w8: *6.17 3835,2645 3940,2750 v1@4000,2750
  Bottom Layer w8: v1@4000,2750 4073.53,2750 4468.97,3145.44 4468.97,3253.97 4494.03,3279.03 ; 4505,3280 4570,3280 4590.97,3259.03 4590.97,3216.76 4635,3172.74 IO.4
  Bottom Layer w15: 4494.03,3279.03 4504.03,3279.03 4505,3280
  other v1: 3995,2750
P44: *6.26 TB6612.22@4345.43,2775.75 | length 354.6
  Top Layer w8: *6.26 4192.01,2752.01 4265,2825 4323.48,2825 4345.43,2803.05 TB6612.22@4345.43,2775.75
P45: *6.27 TB6612.21@4371.02,2775.75 | length 412.7
  Top Layer w8: *6.27 4178.5,2783.5 4250,2855 4350,2855 4370.31,2834.69 TB6612.21@4370.31,2787.62
  Top Layer w15: TB6612.21@4371.74,2789.06 4371.74,2803.77
P46: *6.29 TB6612.16@4498.98,2775.75 | length 565.9
  Top Layer w10: *6.29 4081.72,2846.5 4092.36,2857.13 4093.95,2857.13 4160.94,2924.12 4160.94,2925.94 4170,2935 4375,2935 4498.98,2811.02 TB6612.16@4498.98,2775.75
R: *1.5 *6.39 | length 1261.7
  Top Layer w8: *6.39 v1(3835,3155)
  Bottom Layer w8: *1.5@2705,3155 v1(3835,3155)
  Bottom Layer w20: *1.5 *1.5@2705,3155
reset: *6.4 C3.2 R4.1 RESET.2 | length 640.3
  Top Layer w10: RESET.2 3365,3055 3365,3005 3420,2950 C3.2 *6.4@3610.55,2880 ; *6.4 v1(3709.01,2877.99)
RXD: *6.7 Bluetooth.4 UART.4 | length 1758.1
  Top Layer w8: v1(3607.56,2783.5) *6.7 3696.5,2783.5 v1(3710,2770) ; v1(3930,2770) 4000,2770 v1@4005,2775
  Bottom Layer w8: v1(3710,2770) v1(3930,2770) ; v1(4010,2780) 4082.31,2780 4410.53,3108.21 4410.53,3485.53 UART.4
  Bottom Layer w20: UART.4 Bluetooth.4
RXD2: *6.43 Bluetooth2.4 | length 1308.5
  Top Layer w10: *6.43 3709.02,3069.02 3742.5,3102.5 v4(3807.5,3102.5) ; v4(3910,2975) 3920,2965 3955,2965 v4(3980,2940) ; v4(4215,2960) 4500,2960 Bluetooth2.4
  Bottom Layer w10: v4(3807.5,3102.5) 3910,3000 v4(3910,2975) ; v4(3980,2940) 4195,2940 v4(4215,2960)
SCL: *1.3 *6.41 | length 1144.3
  Top Layer w8: v1@3770,2965 *6.41@3770,3035.43
  Bottom Layer w8: *1.3@2697,2963 v1@3768,2963
  Bottom Layer w20: *1.3 *1.3@2697,2963
  other v1: 3765,2965
SDA: *1.4 *6.40 | length 1110
  Bottom Layer w8: *1.4 v1@3805,3065
  other v1: 3800,3065
Step: *6.12 A4988.13 | length 901.1
  Bottom Layer w8: A4988.13 2847.03,2577.97 3357.97,2577.97 ; 3363.22,2577.97 3662.97,2577.97 v1@3675,2590
  Bottom Layer w15: 3357.97,2577.97 3360,2580 3361.2,2580 3363.22,2577.97
  other v1: 3677.52,2592.56
TXD: *6.5 Bluetooth.3 UART.3 | length 1668.1
  Top Layer w8: v1(3595,2845) 3956.16,2845 4010,2898.84 v1(4010,2965) ; v1(4170,2965) 4265,3060 4305,3060 4329.47,3084.47 4329.47,3341.79 4353.21,3365.53 4390.53,3365.53 UART.3
  Bottom Layer w8: v1(4010,2965) v1(4170,2965)
  Bottom Layer w15: UART.3 Bluetooth.3
TXD2: *6.42 Bluetooth2.3 | length 1174.8
  Top Layer w8: v4(3890,2990) 3893.5,2993.5 3917.66,2993.5 3918.82,2992.34 3921.43,2994.94 4024.94,2994.94 v12(4030,3000) ; v13(4245,3000) 4560,3000 Bluetooth2.3
  Top Layer w10: v4(3740.51,2990.51) *6.42 ; v4(3890,2990) v4@3896.06,2990
  Bottom Layer w8: v12(4030,3000) v13(4245,3000)
  Bottom Layer w10: v4(3740.51,2990.51) 3741.02,2990 v4(3890,2990)
VCC: *6.38 Bluetooth2.1 Bluetooth.1 C3.1 C4.1 C5.1 C6.2 D1.2 RESET.1 UART.1 | length 3156.6
  Top Layer w10: C5.1 3265,3260 D1.2 3380,3310 RESET.1 3645,3235 C4.1 ; C3.1 3460,3030 C4.1 ; v2@3866.5,2946.5 *6.38 3865,3038.94 3865,3165 3845,3185 3753.79,3185 3723.79,3215 C4.1 ; v1(4440,3465) 4270,3465 4120,3315 3745,3315 C4.1
  Bottom Layer w10: v1(4440,3465) 4540,3465 UART.1
  Bottom Layer w20: UART.1 Bluetooth.1 Bluetooth2.1@4765,2995
  other v2: 3865,2945
pads on no net: *6.6 A4988.16 KEY.3 POWER.3

## Polygon pours and split planes (outlines as drawn)
GND on Top Layer "Top Layer-No Net" (solid, remove dead copper, pour order 16): 1265,4530 1420,4375 1420,1175 6055,1175 5790,1440 5790,4505
GND on Bottom Layer "Top Layer-No Net" (solid, remove dead copper, pour order 18): 1990,4085 1990,1510 2055,1445 2110,1500 5115,1500 5115,4035 5200,4120

## Keep-outs
Keep-Out Layer:
  lines w10: 4775.03,3925.68 cw(c4767.5,3742.5) 4950,3725 4950,1850 cw(c4832.5,1857.5) 4825,1740 2275,1740 cw(c2277.5,1847.5) 2170,1850 2170,3765 cw(c2330,3765) 2330,3925 4785,3925

## Silkscreen, mask and mechanical layers (free items; w line width, h text height)
Top Overlay:
  text "G" at 4005,3825 h80
  text "6V" at 3890,3820 h80
  text "辽科大" at 2305,3790 h150
  text "G" at 4455,3720 h80
  text "RX  TX   G   5V" at 4845,3720 h60 r270
  text "OUT-" at 2205,3695 h60 r270
  text "6V" at 4450,3625 h80
  text "PWM" at 4435,3515 h60
  text "OUT+" at 2200,3505 h60 r270
  text "G   5V INT0" at 4430,3340 h60 r270
  text "DC   R SDA SCL 5V  G" at 2765,3305 h60 r270
  text "IN-" at 2195,3225 h80 r270
  text "IN+" at 2195,3050 h80 r270
  text "5V  G  TX2 RX2" at 4845,3015 h60 r270
  text "DIR" at 2665,2540 h60
  text "EN" at 3360,2525 h80
  text "A1  A2  B1  B2" at 4265,2325 h60
  text "-" at 2205,2105 h60
  text "Input" at 3170,1980 h60
  text "+" at 2210,1910 h60
  text "1B  1A  2A  2B" at 2880,1775 h60
  text "7-12V" at 2305,1765 h50
  text "GND 5V" at 3395,1760 h60
  text "A1  A2  B1  B2" at 3665,1760 h60
  text "A1  A2  B1  B2" at 4525,1760 h60
  text "A1  A2  B1  B2" at 4095,1755 h60
Bottom Overlay:
  text "机械臂消防清障车" at 4220,3055 h180